# Altium PCB Advanced Clock.PcbDoc (part 5 of 7)
Units mil, origin at the board's own origin, x right, y up, seen from the top; angles counter-clockwise.
Board outline 3854 x 3880 mil, 2 copper layers (Top Layer, Bottom Layer); 117 components, 90 nets, 504 pads, 209 vias.
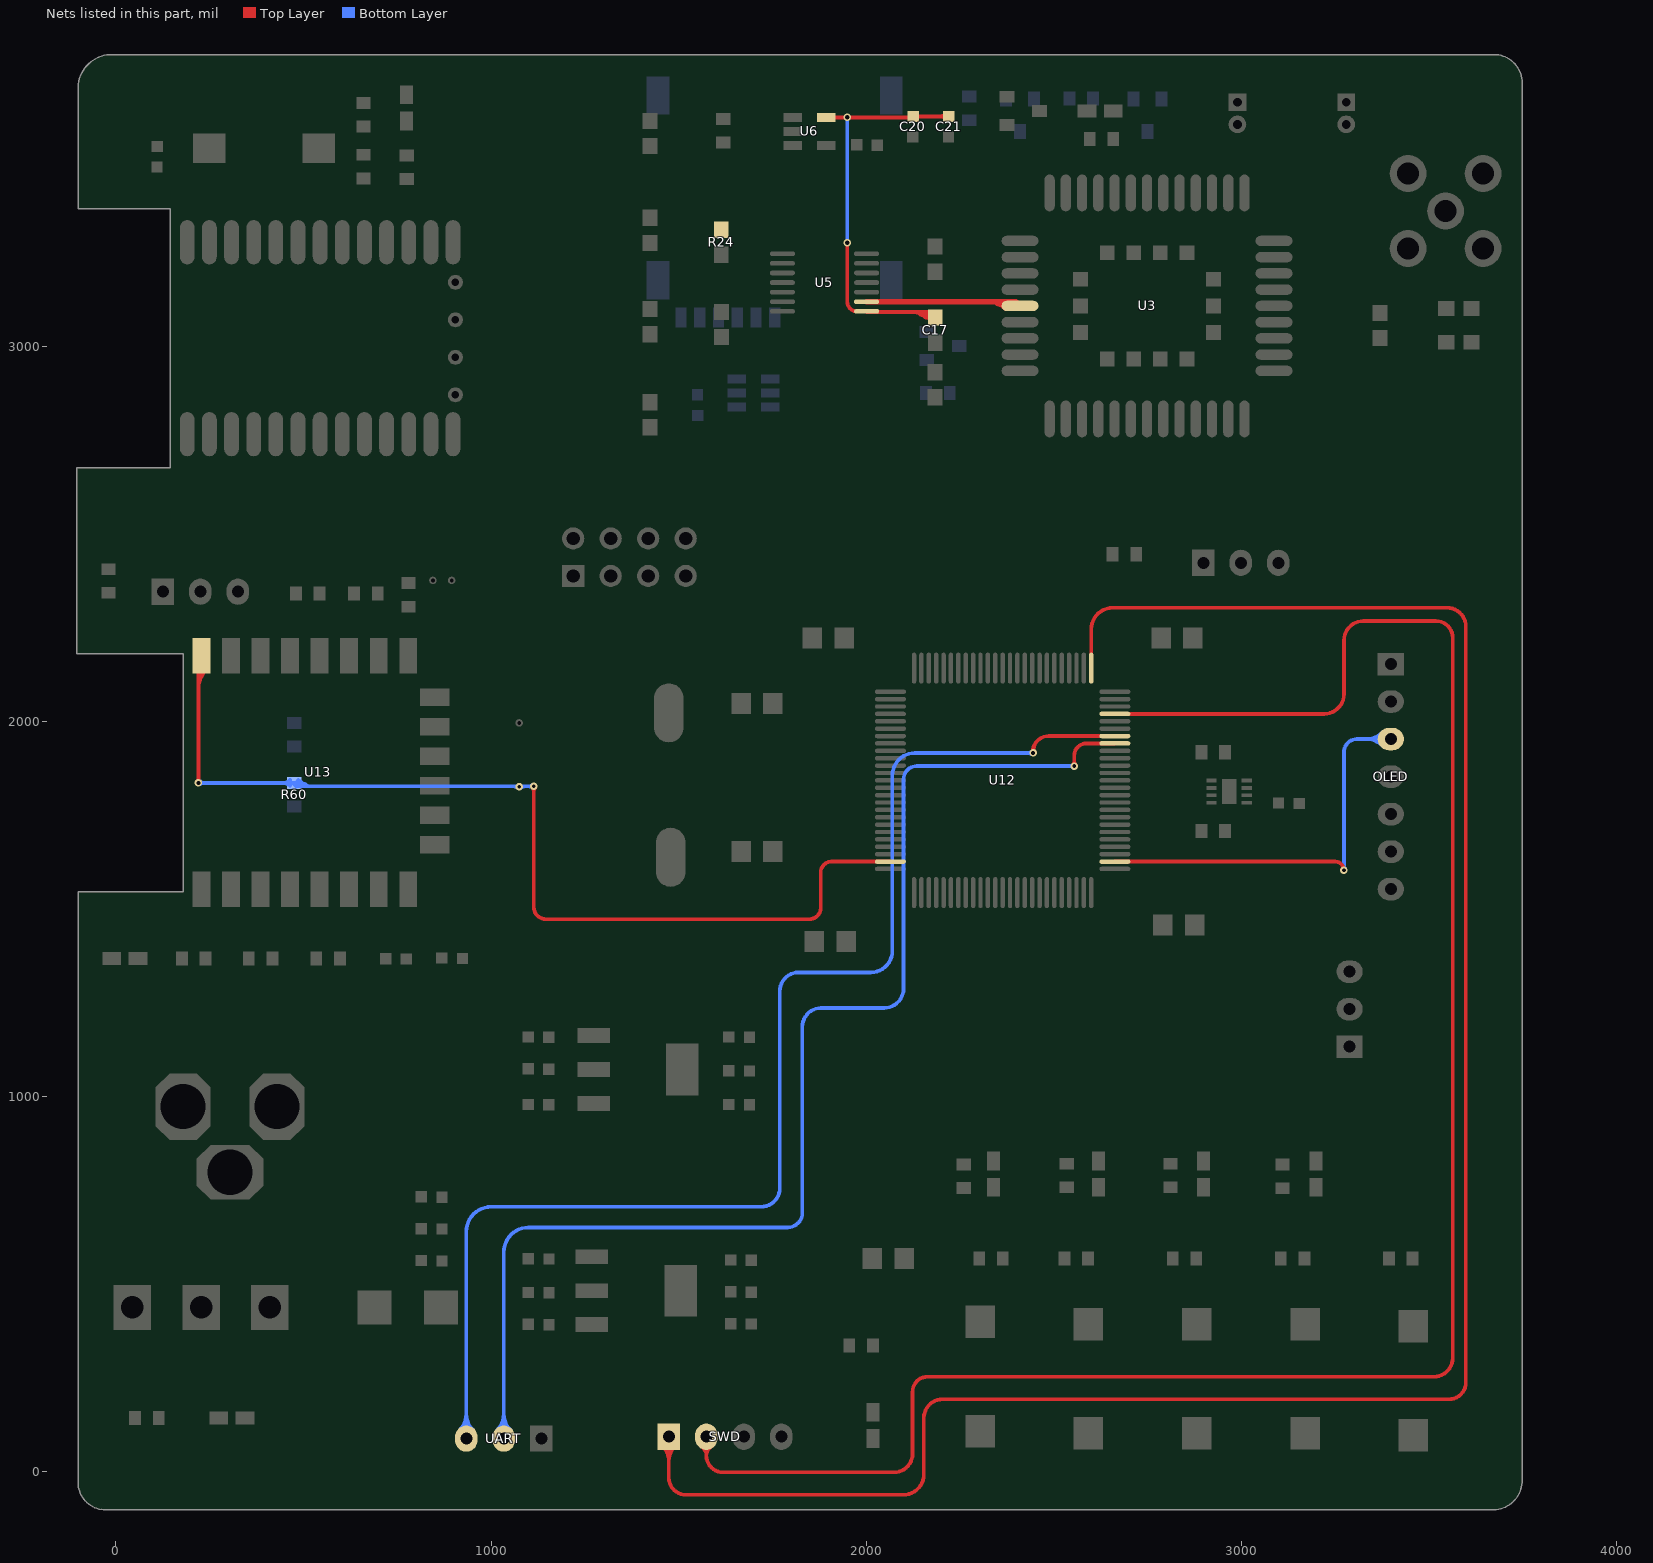
[diagram p5: the nets of this part, all layers, seen from the top]

## Via types
v1: diameter 20, hole 12, Top Layer to Bottom Layer, 133 vias
v2: diameter 20, hole 10, Top Layer to Bottom Layer, 30 vias
v3: diameter 15, hole 7, Top Layer to Bottom Layer, 26 vias
v4: diameter 30, hole 20, Top Layer to Bottom Layer, 11 vias
v5: diameter 138, hole 137.8, Top Layer to Bottom Layer, 4 vias
v6: diameter 50, hole 30, Top Layer to Bottom Layer, 4 vias
v7: diameter 40, hole 20, Top Layer to Bottom Layer, 1 vias

## Nets (pads, with @x,y where several pads share a name; then routed paths per layer and width w, separated by ;. In a path a pad name is that pad's centre, name@x,y a point inside that pad or via, vN(x,y) a via of type N, cw(c..) or ccw(c..) an arc to the next point about the centre after c; other vN are vias at no path point) (continued)
SPI2_SCK: OLED.3 U12.52 | length 2146
  Top Layer w10: U12.52@2663.21,1625.46 3250.54,1625.46 cw(c3250.54,1602) v2(3274,1602) ; v2@3269.67,1604.5 ccw(c3259.22,1610.54) 3270.88,1613.66 ; v2@3269.67,1604.5 ccw(c3259.22,1610.54) 3270.88,1613.66 ; v2@3269.67,1604.5 ccw(c3259.22,1610.54) 3270.88,1613.66 ; v2@3269.67,1604.5 ccw(c3259.22,1610.54) 3270.88,1613.66 ; v2@3269.67,1604.5 ccw(c3259.22,1610.54) 3270.88,1613.66 ; v2@3269.67,1604.5 ccw(c3259.22,1610.54) 3270.88,1613.66 ; v2@3269.67,1604.5 ccw(c3259.22,1610.54) 3270.88,1613.66 ; v2@3269.67,1604.5 ccw(c3259.22,1610.54) 3270.88,1613.66 ; 3270.88,1613.66 ccw(c3282.54,1616.78) v2@3276.5,1606.33 ; 3270.88,1613.66 ccw(c3282.54,1616.78) v2@3276.5,1606.33 ; 3270.88,1613.66 ccw(c3282.54,1616.78) v2@3276.5,1606.33 ; 3270.88,1613.66 ccw(c3282.54,1616.78) v2@3276.5,1606.33 ; 3270.88,1613.66 ccw(c3282.54,1616.78) v2@3276.5,1606.33 ; 3270.88,1613.66 ccw(c3282.54,1616.78) v2@3276.5,1606.33 ; 3270.88,1613.66 ccw(c3282.54,1616.78) v2@3276.5,1606.33 ; 3270.88,1613.66 ccw(c3282.54,1616.78) v2@3276.5,1606.33
  Bottom Layer w10: v2(3274,1602) 3274,1917 cw(c3309,1917) 3309,1952 OLED.3@3399,1952 ; v2@3270.46,1605.54 ccw(c3261.93,1614.07) 3274,1614.07 ; v2@3270.46,1605.54 ccw(c3261.93,1614.07) 3274,1614.07 ; v2@3270.46,1605.54 ccw(c3261.93,1614.07) 3274,1614.07 ; v2@3270.46,1605.54 ccw(c3261.93,1614.07) 3274,1614.07 ; v2@3270.46,1605.54 ccw(c3261.93,1614.07) 3274,1614.07 ; v2@3270.46,1605.54 ccw(c3261.93,1614.07) 3274,1614.07 ; v2@3270.46,1605.54 ccw(c3261.93,1614.07) 3274,1614.07 ; v2@3270.46,1605.54 ccw(c3261.93,1614.07) 3274,1614.07 ; 3274,1614.07 ccw(c3286.07,1614.07) v2@3277.54,1605.54 ; 3274,1614.07 ccw(c3286.07,1614.07) v2@3277.54,1605.54 ; 3274,1614.07 ccw(c3286.07,1614.07) v2@3277.54,1605.54 ; 3274,1614.07 ccw(c3286.07,1614.07) v2@3277.54,1605.54 ; 3274,1614.07 ccw(c3286.07,1614.07) v2@3277.54,1605.54 ; 3274,1614.07 ccw(c3286.07,1614.07) v2@3277.54,1605.54 ; 3274,1614.07 ccw(c3286.07,1614.07) v2@3277.54,1605.54 ; 3274,1614.07 ccw(c3286.07,1614.07) v2@3277.54,1605.54 ; 3333.64,1952 cw(c3333.64,1891.64) OLED.3@3376.32,1934.32 ; 3333.64,1952 ccw(c3333.64,2012.36) OLED.3@3376.32,1969.68 ; 3333.64,1952 cw(c3333.64,1891.64) OLED.3@3376.32,1934.32 ; 3333.64,1952 ccw(c3333.64,2012.36) OLED.3@3376.32,1969.68 ; 3333.64,1952 cw(c3333.64,1891.64) OLED.3@3376.32,1934.32 ; 3333.64,1952 ccw(c3333.64,2012.36) OLED.3@3376.32,1969.68 ; 3333.64,1952 cw(c3333.64,1891.64) OLED.3@3376.32,1934.32 ; 3333.64,1952 ccw(c3333.64,2012.36) OLED.3@3376.32,1969.68 ; 3333.64,1952 cw(c3333.64,1891.64) OLED.3@3376.32,1934.32 ; 3333.64,1952 ccw(c3333.64,2012.36) OLED.3@3376.32,1969.68 ; 3357.79,1952 cw(c3357.79,1915.79) OLED.3@3383.39,1941.39 ; 3357.79,1952 ccw(c3357.79,1988.21) OLED.3@3383.39,1962.61 ; 3357.79,1952 cw(c3357.79,1915.79) OLED.3@3383.39,1941.39 ; 3357.79,1952 ccw(c3357.79,1988.21) OLED.3@3383.39,1962.61 ; 3357.79,1952 cw(c3357.79,1915.79) OLED.3@3383.39,1941.39 ; 3357.79,1952 ccw(c3357.79,1988.21) OLED.3@3383.39,1962.61 ; 3357.79,1952 cw(c3357.79,1915.79) OLED.3@3383.39,1941.39 ; 3357.79,1952 ccw(c3357.79,1988.21) OLED.3@3383.39,1962.61 ; 3357.79,1952 cw(c3357.79,1915.79) OLED.3@3383.39,1941.39 ; 3357.79,1952 ccw(c3357.79,1988.21) OLED.3@3383.39,1962.61
SW_CLK: SWD.1 U12.76 | length 6433
  Top Layer w10: SWD.1@1474,92 1474,-17.19 ccw(c1519.81,-17.19) 1519.81,-63 2099,-63 ccw(c2099,-8) 2154,-8 2154,142 cw(c2204,142) 2204,192 3554,192 ccw(c3554,237) 3599,237 3599,2252 ccw(c3549,2252) 3549,2302 2657.38,2302 ccw(c2657.38,2244.84) 2600.22,2244.84 U12.76@2600.22,2141.21 ; SWD.1@1456.32,69.32 cw(c1413.64,26.64) 1474,26.64 ; SWD.1@1456.32,69.32 cw(c1413.64,26.64) 1474,26.64 ; SWD.1@1456.32,69.32 cw(c1413.64,26.64) 1474,26.64 ; SWD.1@1456.32,69.32 cw(c1413.64,26.64) 1474,26.64 ; SWD.1@1456.32,69.32 cw(c1413.64,26.64) 1474,26.64 ; SWD.1@1463.39,76.39 cw(c1437.79,50.79) 1474,50.79 ; SWD.1@1463.39,76.39 cw(c1437.79,50.79) 1474,50.79 ; SWD.1@1463.39,76.39 cw(c1437.79,50.79) 1474,50.79 ; SWD.1@1463.39,76.39 cw(c1437.79,50.79) 1474,50.79 ; SWD.1@1463.39,76.39 cw(c1437.79,50.79) 1474,50.79 ; 1474,26.64 cw(c1534.36,26.64) SWD.1@1491.68,69.32 ; 1474,26.64 cw(c1534.36,26.64) SWD.1@1491.68,69.32 ; 1474,26.64 cw(c1534.36,26.64) SWD.1@1491.68,69.32 ; 1474,26.64 cw(c1534.36,26.64) SWD.1@1491.68,69.32 ; 1474,26.64 cw(c1534.36,26.64) SWD.1@1491.68,69.32 ; 1474,50.79 cw(c1510.21,50.79) SWD.1@1484.61,76.39 ; 1474,50.79 cw(c1510.21,50.79) SWD.1@1484.61,76.39 ; 1474,50.79 cw(c1510.21,50.79) SWD.1@1484.61,76.39 ; 1474,50.79 cw(c1510.21,50.79) SWD.1@1484.61,76.39 ; 1474,50.79 cw(c1510.21,50.79) SWD.1@1484.61,76.39
SW_DIO: SWD.2 U12.72 | length 5643.7
  Top Layer w10: SWD.2@1574,92 1574,42 ; U12.72@2663.21,2019.17 3221.17,2019.17 ccw(c3221.17,2072) 3274,2072 3274,2214.68 cw(c3326.32,2214.68) 3326.32,2267 3519,2267 cw(c3519,2222) 3564,2222 3564,302 cw(c3514,302) 3514,252 2164,252 ccw(c2164,212) 2124,212 2124,47 cw(c2074,47) 2074,-3 1619,-3 cw(c1619,42) 1574,42 ; SWD.2@1560.79,65.77 cw(c1546,42) 1574,42 ; SWD.2@1560.79,65.77 cw(c1546,42) 1574,42 ; SWD.2@1560.79,65.77 cw(c1546,42) 1574,42 ; SWD.2@1560.79,65.77 cw(c1546,42) 1574,42 ; SWD.2@1560.79,65.77 cw(c1546,42) 1574,42 ; 1574,42 cw(c1602,42) SWD.2@1587.21,65.77 ; 1574,42 cw(c1602,42) SWD.2@1587.21,65.77 ; 1574,42 cw(c1602,42) SWD.2@1587.21,65.77 ; 1574,42 cw(c1602,42) SWD.2@1587.21,65.77 ; 1574,42 cw(c1602,42) SWD.2@1587.21,65.77
"TXD TTL": pad.1 R60.1 U12.24 U13.8 | length 4959.6
  Top Layer w10: v2(220,1835) 220,2171.94 cw(c225,2171.94) 225,2176.94 ccw(c227.82,2176.94) U13.8@227.82,2174.13 ; v2(1114,1826) 1114,1504.25 ccw(c1146.25,1504.25) 1146.25,1472 1849,1472 ccw(c1849,1502) 1879,1502 1879,1596.81 cw(c1907.66,1596.81) 1907.66,1625.46 U12.24@2064.79,1625.46 ; U13.8@214.65,2137.34 cw(c201.73,2124.42) 220,2124.42 ; U13.8@214.65,2137.34 cw(c201.73,2124.42) 220,2124.42 ; U13.8@214.65,2137.34 cw(c201.73,2124.42) 220,2124.42 ; U13.8@214.65,2137.34 cw(c201.73,2124.42) 220,2124.42 ; U13.8@214.65,2137.34 cw(c201.73,2124.42) 220,2124.42 ; v2@216.46,1838.54 ccw(c207.93,1847.07) 220,1847.07 ; v2@216.46,1838.54 ccw(c207.93,1847.07) 220,1847.07 ; v2@216.46,1838.54 ccw(c207.93,1847.07) 220,1847.07 ; v2@216.46,1838.54 ccw(c207.93,1847.07) 220,1847.07 ; v2@216.46,1838.54 ccw(c207.93,1847.07) 220,1847.07 ; v2@216.46,1838.54 ccw(c207.93,1847.07) 220,1847.07 ; v2@216.46,1838.54 ccw(c207.93,1847.07) 220,1847.07 ; v2@216.46,1838.54 ccw(c207.93,1847.07) 220,1847.07 ; 220,1847.07 ccw(c232.07,1847.07) v2@223.54,1838.54 ; 220,1847.07 ccw(c232.07,1847.07) v2@223.54,1838.54 ; 220,1847.07 ccw(c232.07,1847.07) v2@223.54,1838.54 ; 220,1847.07 ccw(c232.07,1847.07) v2@223.54,1838.54 ; 220,1847.07 ccw(c232.07,1847.07) v2@223.54,1838.54 ; 220,1847.07 ccw(c232.07,1847.07) v2@223.54,1838.54 ; 220,1847.07 ccw(c232.07,1847.07) v2@223.54,1838.54 ; 220,1847.07 ccw(c232.07,1847.07) v2@223.54,1838.54 ; 220,2086.67 cw(c291.65,2086.67) U13.8@240.99,2137.34 ; 220,2086.67 cw(c291.65,2086.67) U13.8@240.99,2137.34 ; 220,2086.67 cw(c291.65,2086.67) U13.8@240.99,2137.34 ; 220,2086.67 cw(c291.65,2086.67) U13.8@240.99,2137.34 ; 220,2086.67 cw(c291.65,2086.67) U13.8@240.99,2137.34 ; 220,2110.81 cw(c267.51,2110.81) U13.8@233.91,2144.41 ; 220,2110.81 cw(c267.51,2110.81) U13.8@233.91,2144.41 ; 220,2110.81 cw(c267.51,2110.81) U13.8@233.91,2144.41 ; 220,2110.81 cw(c267.51,2110.81) U13.8@233.91,2144.41 ; 220,2110.81 cw(c267.51,2110.81) U13.8@233.91,2144.41 ; v2@1110.46,1822.46 cw(c1101.93,1813.93) 1114,1813.93 ; v2@1110.46,1822.46 cw(c1101.93,1813.93) 1114,1813.93 ; v2@1110.46,1822.46 cw(c1101.93,1813.93) 1114,1813.93 ; v2@1110.46,1822.46 cw(c1101.93,1813.93) 1114,1813.93 ; v2@1110.46,1822.46 cw(c1101.93,1813.93) 1114,1813.93 ; v2@1110.46,1822.46 cw(c1101.93,1813.93) 1114,1813.93 ; v2@1110.46,1822.46 cw(c1101.93,1813.93) 1114,1813.93 ; v2@1110.46,1822.46 cw(c1101.93,1813.93) 1114,1813.93 ; 1114,1813.93 cw(c1126.07,1813.93) v2@1117.54,1822.46 ; 1114,1813.93 cw(c1126.07,1813.93) v2@1117.54,1822.46 ; 1114,1813.93 cw(c1126.07,1813.93) v2@1117.54,1822.46 ; 1114,1813.93 cw(c1126.07,1813.93) v2@1117.54,1822.46 ; 1114,1813.93 cw(c1126.07,1813.93) v2@1117.54,1822.46 ; 1114,1813.93 cw(c1126.07,1813.93) v2@1117.54,1822.46 ; 1114,1813.93 cw(c1126.07,1813.93) v2@1117.54,1822.46 ; 1114,1813.93 cw(c1126.07,1813.93) v2@1117.54,1822.46
  Bottom Layer w10: v2@225,1840 ccw(c230,1840) 230,1835 R60.1@475,1835 ccw(c484,1835) 484,1826 v2(1114,1826) ; v2@223.54,1831.46 cw(c232.07,1822.93) 232.07,1835 ; v2@223.54,1831.46 cw(c232.07,1822.93) 232.07,1835 ; v2@223.54,1831.46 cw(c232.07,1822.93) 232.07,1835 ; v2@223.54,1831.46 cw(c232.07,1822.93) 232.07,1835 ; v2@223.54,1831.46 cw(c232.07,1822.93) 232.07,1835 ; v2@223.54,1831.46 cw(c232.07,1822.93) 232.07,1835 ; v2@223.54,1831.46 cw(c232.07,1822.93) 232.07,1835 ; v2@223.54,1831.46 cw(c232.07,1822.93) 232.07,1835 ; v2@223.54,1838.54 ccw(c232.07,1847.07) 232.07,1835 ; v2@223.54,1838.54 ccw(c232.07,1847.07) 232.07,1835 ; v2@223.54,1838.54 ccw(c232.07,1847.07) 232.07,1835 ; v2@223.54,1838.54 ccw(c232.07,1847.07) 232.07,1835 ; v2@223.54,1838.54 ccw(c232.07,1847.07) 232.07,1835 ; v2@223.54,1838.54 ccw(c232.07,1847.07) 232.07,1835 ; v2@223.54,1838.54 ccw(c232.07,1847.07) 232.07,1835 ; v2@223.54,1838.54 ccw(c232.07,1847.07) 232.07,1835 ; 445.8,1835 cw(c445.8,1809.05) R60.1@464.15,1827.4 ; 445.8,1835 ccw(c445.8,1860.95) R60.1@464.15,1842.6 ; 445.8,1835 cw(c445.8,1809.05) R60.1@464.15,1827.4 ; 445.8,1835 ccw(c445.8,1860.95) R60.1@464.15,1842.6 ; 445.8,1835 cw(c445.8,1809.05) R60.1@464.15,1827.4 ; 445.8,1835 ccw(c445.8,1860.95) R60.1@464.15,1842.6 ; 445.8,1835 cw(c445.8,1809.05) R60.1@464.15,1827.4 ; 445.8,1835 ccw(c445.8,1860.95) R60.1@464.15,1842.6 ; 445.8,1835 cw(c445.8,1809.05) R60.1@464.15,1827.4 ; 445.8,1835 ccw(c445.8,1860.95) R60.1@464.15,1842.6 ; 445.8,1835 cw(c445.8,1809.05) R60.1@464.15,1827.4 ; 445.8,1835 ccw(c445.8,1860.95) R60.1@464.15,1842.6 ; 445.8,1835 cw(c445.8,1809.05) R60.1@464.15,1827.4 ; 445.8,1835 ccw(c445.8,1860.95) R60.1@464.15,1842.6 ; 445.8,1835 cw(c445.8,1809.05) R60.1@464.15,1827.4 ; 445.8,1835 ccw(c445.8,1860.95) R60.1@464.15,1842.6 ; R60.1@478.8,1834.5 cw(c488.69,1825.57) 495.36,1837.11 ; R60.1@478.8,1834.5 cw(c488.69,1825.57) 495.36,1837.11 ; R60.1@478.8,1834.5 cw(c488.69,1825.57) 495.36,1837.11 ; R60.1@478.8,1834.5 cw(c488.69,1825.57) 495.36,1837.11 ; R60.1@478.8,1834.5 cw(c488.69,1825.57) 495.36,1837.11 ; R60.1@478.8,1834.5 cw(c488.69,1825.57) 495.36,1837.11 ; R60.1@478.8,1834.5 cw(c488.69,1825.57) 495.36,1837.11 ; R60.1@478.8,1834.5 cw(c488.69,1825.57) 495.36,1837.11 ; R60.1@478.8,1834.5 cw(c488.69,1825.57) 495.36,1837.11 ; R60.1@478.8,1834.5 cw(c488.69,1825.57) 495.36,1837.11 ; R60.1@478.78,1835.53 ccw(c501.78,1858.53) 501.78,1826 ; R60.1@478.78,1835.53 ccw(c501.78,1858.53) 501.78,1826 ; R60.1@478.78,1835.53 ccw(c501.78,1858.53) 501.78,1826 ; R60.1@478.78,1835.53 ccw(c501.78,1858.53) 501.78,1826 ; R60.1@478.78,1835.53 ccw(c501.78,1858.53) 501.78,1826 ; R60.1@485.85,1842.6 ccw(c525.92,1882.68) 525.92,1826 ; R60.1@485.85,1842.6 ccw(c525.92,1882.68) 525.92,1826 ; R60.1@485.85,1842.6 ccw(c525.92,1882.68) 525.92,1826 ; R60.1@485.85,1842.6 ccw(c525.92,1882.68) 525.92,1826 ; R60.1@485.85,1842.6 ccw(c525.92,1882.68) 525.92,1826 ; R60.1@486.23,1827.8 cw(c498.08,1817.1) 506.06,1830.93 ; R60.1@486.23,1827.8 cw(c498.08,1817.1) 506.06,1830.93 ; R60.1@486.23,1827.8 cw(c498.08,1817.1) 506.06,1830.93 ; R60.1@486.23,1827.8 cw(c498.08,1817.1) 506.06,1830.93 ; R60.1@486.23,1827.8 cw(c498.08,1817.1) 506.06,1830.93 ; R60.1@486.23,1827.8 cw(c498.08,1817.1) 506.06,1830.93 ; R60.1@486.23,1827.8 cw(c498.08,1817.1) 506.06,1830.93 ; R60.1@486.23,1827.8 cw(c498.08,1817.1) 506.06,1830.93 ; R60.1@486.23,1827.8 cw(c498.08,1817.1) 506.06,1830.93 ; R60.1@486.23,1827.8 cw(c498.08,1817.1) 506.06,1830.93 ; 1060.51,1826 cw(c1060.51,1810.51) pad.1@1071.46,1821.46 ; 1060.51,1826 cw(c1060.51,1810.51) pad.1@1071.46,1821.46 ; 1060.51,1826 cw(c1060.51,1810.51) pad.1@1071.46,1821.46 ; pad.1@1078.54,1821.46 cw(c1089.49,1810.51) 1089.49,1826 ; pad.1@1078.54,1821.46 cw(c1089.49,1810.51) 1089.49,1826 ; pad.1@1078.54,1821.46 cw(c1089.49,1810.51) 1089.49,1826 ; 1101.93,1826 cw(c1101.93,1813.93) v2@1110.46,1822.46 ; 1101.93,1826 ccw(c1101.93,1838.07) v2@1110.46,1829.54 ; 1101.93,1826 cw(c1101.93,1813.93) v2@1110.46,1822.46 ; 1101.93,1826 ccw(c1101.93,1838.07) v2@1110.46,1829.54 ; 1101.93,1826 cw(c1101.93,1813.93) v2@1110.46,1822.46 ; 1101.93,1826 ccw(c1101.93,1838.07) v2@1110.46,1829.54 ; 1101.93,1826 cw(c1101.93,1813.93) v2@1110.46,1822.46 ; 1101.93,1826 ccw(c1101.93,1838.07) v2@1110.46,1829.54 ; 1101.93,1826 cw(c1101.93,1813.93) v2@1110.46,1822.46 ; 1101.93,1826 ccw(c1101.93,1838.07) v2@1110.46,1829.54 ; 1101.93,1826 cw(c1101.93,1813.93) v2@1110.46,1822.46 ; 1101.93,1826 ccw(c1101.93,1838.07) v2@1110.46,1829.54 ; 1101.93,1826 cw(c1101.93,1813.93) v2@1110.46,1822.46 ; 1101.93,1826 ccw(c1101.93,1838.07) v2@1110.46,1829.54 ; 1101.93,1826 cw(c1101.93,1813.93) v2@1110.46,1822.46 ; 1101.93,1826 ccw(c1101.93,1838.07) v2@1110.46,1829.54
TXD_BC26: U3.18 U5.2 | length 858.8
  Top Layer w10: U3.18@2399.39,3118.02 cw(c2399.39,3107) U3.18@2410.42,3107
  Top Layer w15: U5.2@2001.2,3118.02 U3.18@2399.39,3118.02 ; 2333.21,3118.02 cw(c2333.21,3065.23) U3.18@2370.54,3102.56 ; 2333.21,3118.02 cw(c2333.21,3065.23) U3.18@2370.54,3102.56 ; 2333.21,3118.02 cw(c2333.21,3065.23) U3.18@2370.54,3102.56 ; 2333.21,3118.02 cw(c2333.21,3065.23) U3.18@2370.54,3102.56 ; 2333.21,3118.02 cw(c2333.21,3065.23) U3.18@2370.54,3102.56 ; 2349.91,3114.47 ccw(c2362.97,3137.1) U3.18@2372.66,3112.83 ; 2349.91,3114.47 ccw(c2362.97,3137.1) U3.18@2372.66,3112.83 ; 2349.91,3114.47 ccw(c2362.97,3137.1) U3.18@2372.66,3112.83 ; 2349.91,3114.47 ccw(c2362.97,3137.1) U3.18@2372.66,3112.83 ; 2349.91,3114.47 ccw(c2362.97,3137.1) U3.18@2372.66,3112.83 ; 2349.91,3114.47 ccw(c2362.97,3137.1) U3.18@2372.66,3112.83 ; 2349.91,3114.47 ccw(c2362.97,3137.1) U3.18@2372.66,3112.83 ; 2349.91,3114.47 ccw(c2362.97,3137.1) U3.18@2372.66,3112.83 ; 2349.91,3114.47 ccw(c2362.97,3137.1) U3.18@2372.66,3112.83 ; 2349.91,3114.47 ccw(c2362.97,3137.1) U3.18@2372.66,3112.83
UART1_RX: U12.69 UART.3 | length 4478.9
  Top Layer w10: v2@2444,1917 cw(c2487.11,1917) 2487.11,1960.11 U12.69@2663.21,1960.11 ; 2447.62,1930.5 ccw(c2464.17,1926.07) v2@2449.33,1917.5 ; 2447.62,1930.5 ccw(c2464.17,1926.07) v2@2449.33,1917.5 ; 2447.62,1930.5 ccw(c2464.17,1926.07) v2@2449.33,1917.5 ; 2447.62,1930.5 ccw(c2464.17,1926.07) v2@2449.33,1917.5 ; 2447.62,1930.5 ccw(c2464.17,1926.07) v2@2449.33,1917.5 ; 2447.62,1930.5 ccw(c2464.17,1926.07) v2@2449.33,1917.5 ; 2447.62,1930.5 ccw(c2464.17,1926.07) v2@2449.33,1917.5 ; 2447.62,1930.5 ccw(c2464.17,1926.07) v2@2449.33,1917.5
  Bottom Layer w10: UART.3@934,87 934,638.75 cw(c1000.25,638.75) 1000.25,705 1720,705 ccw(c1720,755) 1770,755 1770,1280 cw(c1820,1280) 1820,1330 2012.64,1330 ccw(c2012.64,1387.36) 2070,1387.36 2070,1855 cw(c2130,1855) 2130,1915 v2(2445,1915) ; UART.3@916.32,109.68 ccw(c873.64,152.36) 934,152.36 ; UART.3@916.32,109.68 ccw(c873.64,152.36) 934,152.36 ; UART.3@916.32,109.68 ccw(c873.64,152.36) 934,152.36 ; UART.3@916.32,109.68 ccw(c873.64,152.36) 934,152.36 ; UART.3@916.32,109.68 ccw(c873.64,152.36) 934,152.36 ; UART.3@923.39,102.61 ccw(c897.79,128.21) 934,128.21 ; UART.3@923.39,102.61 ccw(c897.79,128.21) 934,128.21 ; UART.3@923.39,102.61 ccw(c897.79,128.21) 934,128.21 ; UART.3@923.39,102.61 ccw(c897.79,128.21) 934,128.21 ; UART.3@923.39,102.61 ccw(c897.79,128.21) 934,128.21 ; 934,128.21 ccw(c970.21,128.21) UART.3@944.61,102.61 ; 934,128.21 ccw(c970.21,128.21) UART.3@944.61,102.61 ; 934,128.21 ccw(c970.21,128.21) UART.3@944.61,102.61 ; 934,128.21 ccw(c970.21,128.21) UART.3@944.61,102.61 ; 934,128.21 ccw(c970.21,128.21) UART.3@944.61,102.61 ; 934,152.36 ccw(c994.36,152.36) UART.3@951.68,109.68 ; 934,152.36 ccw(c994.36,152.36) UART.3@951.68,109.68 ; 934,152.36 ccw(c994.36,152.36) UART.3@951.68,109.68 ; 934,152.36 ccw(c994.36,152.36) UART.3@951.68,109.68 ; 934,152.36 ccw(c994.36,152.36) UART.3@951.68,109.68 ; 2432.93,1915 cw(c2432.93,1902.93) v2@2441.46,1911.46 ; 2432.93,1915 ccw(c2432.93,1927.07) v2@2441.46,1918.54 ; 2432.93,1915 cw(c2432.93,1902.93) v2@2441.46,1911.46 ; 2432.93,1915 ccw(c2432.93,1927.07) v2@2441.46,1918.54 ; 2432.93,1915 cw(c2432.93,1902.93) v2@2441.46,1911.46 ; 2432.93,1915 ccw(c2432.93,1927.07) v2@2441.46,1918.54 ; 2432.93,1915 cw(c2432.93,1902.93) v2@2441.46,1911.46 ; 2432.93,1915 ccw(c2432.93,1927.07) v2@2441.46,1918.54 ; 2432.93,1915 cw(c2432.93,1902.93) v2@2441.46,1911.46 ; 2432.93,1915 ccw(c2432.93,1927.07) v2@2441.46,1918.54 ; 2432.93,1915 cw(c2432.93,1902.93) v2@2441.46,1911.46 ; 2432.93,1915 ccw(c2432.93,1927.07) v2@2441.46,1918.54 ; 2432.93,1915 cw(c2432.93,1902.93) v2@2441.46,1911.46 ; 2432.93,1915 ccw(c2432.93,1927.07) v2@2441.46,1918.54 ; 2432.93,1915 cw(c2432.93,1902.93) v2@2441.46,1911.46 ; 2432.93,1915 ccw(c2432.93,1927.07) v2@2441.46,1918.54
UART1_TX: U12.68 UART.2 | length 4426.5
  Top Layer w10: v2(2555,1880) 2555,1908 cw(c2587.43,1908) 2587.43,1940.43 U12.68@2663.21,1940.43 ; v2@2551.46,1883.54 ccw(c2542.93,1892.07) 2555,1892.07 ; v2@2551.46,1883.54 ccw(c2542.93,1892.07) 2555,1892.07 ; v2@2551.46,1883.54 ccw(c2542.93,1892.07) 2555,1892.07 ; v2@2551.46,1883.54 ccw(c2542.93,1892.07) 2555,1892.07 ; v2@2551.46,1883.54 ccw(c2542.93,1892.07) 2555,1892.07 ; v2@2551.46,1883.54 ccw(c2542.93,1892.07) 2555,1892.07 ; v2@2551.46,1883.54 ccw(c2542.93,1892.07) 2555,1892.07 ; v2@2551.46,1883.54 ccw(c2542.93,1892.07) 2555,1892.07 ; 2555,1892.07 ccw(c2567.07,1892.07) v2@2558.54,1883.54 ; 2555,1892.07 ccw(c2567.07,1892.07) v2@2558.54,1883.54 ; 2555,1892.07 ccw(c2567.07,1892.07) v2@2558.54,1883.54 ; 2555,1892.07 ccw(c2567.07,1892.07) v2@2558.54,1883.54 ; 2555,1892.07 ccw(c2567.07,1892.07) v2@2558.54,1883.54 ; 2555,1892.07 ccw(c2567.07,1892.07) v2@2558.54,1883.54 ; 2555,1892.07 ccw(c2567.07,1892.07) v2@2558.54,1883.54 ; 2555,1892.07 ccw(c2567.07,1892.07) v2@2558.54,1883.54
  Bottom Layer w10: UART.2@1034,87 1034,584.1 cw(c1099.9,584.1) 1099.9,650 1790.86,650 ccw(c1790.86,689.14) 1830,689.14 1830,1185 cw(c1880,1185) 1880,1235 2047.68,1235 ccw(c2047.68,1287.32) 2100,1287.32 2100,1845 cw(c2135,1845) 2135,1880 v2(2555,1880) ; UART.2@1016.32,109.68 ccw(c973.64,152.36) 1034,152.36 ; UART.2@1016.32,109.68 ccw(c973.64,152.36) 1034,152.36 ; UART.2@1016.32,109.68 ccw(c973.64,152.36) 1034,152.36 ; UART.2@1016.32,109.68 ccw(c973.64,152.36) 1034,152.36 ; UART.2@1016.32,109.68 ccw(c973.64,152.36) 1034,152.36 ; UART.2@1023.39,102.61 ccw(c997.79,128.21) 1034,128.21 ; UART.2@1023.39,102.61 ccw(c997.79,128.21) 1034,128.21 ; UART.2@1023.39,102.61 ccw(c997.79,128.21) 1034,128.21 ; UART.2@1023.39,102.61 ccw(c997.79,128.21) 1034,128.21 ; UART.2@1023.39,102.61 ccw(c997.79,128.21) 1034,128.21 ; 1034,128.21 ccw(c1070.21,128.21) UART.2@1044.61,102.61 ; 1034,128.21 ccw(c1070.21,128.21) UART.2@1044.61,102.61 ; 1034,128.21 ccw(c1070.21,128.21) UART.2@1044.61,102.61 ; 1034,128.21 ccw(c1070.21,128.21) UART.2@1044.61,102.61 ; 1034,128.21 ccw(c1070.21,128.21) UART.2@1044.61,102.61 ; 1034,152.36 ccw(c1094.36,152.36) UART.2@1051.68,109.68 ; 1034,152.36 ccw(c1094.36,152.36) UART.2@1051.68,109.68 ; 1034,152.36 ccw(c1094.36,152.36) UART.2@1051.68,109.68 ; 1034,152.36 ccw(c1094.36,152.36) UART.2@1051.68,109.68 ; 1034,152.36 ccw(c1094.36,152.36) UART.2@1051.68,109.68 ; 2542.93,1880 cw(c2542.93,1867.93) v2@2551.46,1876.46 ; 2542.93,1880 ccw(c2542.93,1892.07) v2@2551.46,1883.54 ; 2542.93,1880 cw(c2542.93,1867.93) v2@2551.46,1876.46 ; 2542.93,1880 ccw(c2542.93,1892.07) v2@2551.46,1883.54 ; 2542.93,1880 cw(c2542.93,1867.93) v2@2551.46,1876.46 ; 2542.93,1880 ccw(c2542.93,1892.07) v2@2551.46,1883.54 ; 2542.93,1880 cw(c2542.93,1867.93) v2@2551.46,1876.46 ; 2542.93,1880 ccw(c2542.93,1892.07) v2@2551.46,1883.54 ; 2542.93,1880 cw(c2542.93,1867.93) v2@2551.46,1876.46 ; 2542.93,1880 ccw(c2542.93,1892.07) v2@2551.46,1883.54 ; 2542.93,1880 cw(c2542.93,1867.93) v2@2551.46,1876.46 ; 2542.93,1880 ccw(c2542.93,1892.07) v2@2551.46,1883.54 ; 2542.93,1880 cw(c2542.93,1867.93) v2@2551.46,1876.46 ; 2542.93,1880 ccw(c2542.93,1892.07) v2@2551.46,1883.54 ; 2542.93,1880 cw(c2542.93,1867.93) v2@2551.46,1876.46 ; 2542.93,1880 ccw(c2542.93,1892.07) v2@2551.46,1883.54
VCC1.8: R24.2
VCC1V8: C17.1 C20.2 C21.2 U5.1 U6.5 | length 3013.4
  Top Layer w10: U6.5@1893.29,3609.4 C20.2@2117.54,3609.4 ; v1(1950,3275) 1950,3117.9 ccw(c1975.47,3117.9) 1975.47,3092.43 U5.1@2001.2,3092.43 ccw(c2002.89,3092.43) 2002.89,3090.75 C17.1@2184.17,3090.75 ; C20.2@2125.35,3617.21 cw(c2117.54,3617.21) C20.2@2117.54,3609.4 ; C21.2@2220.35,3612.21 C20.2@2125.35,3612.21 cw(c2122.54,3612.21) 2122.54,3609.4 C20.2@2117.54,3609.4 ; U5.1@2029.29,3093.35 ccw(c2035.57,3099.63) 2035.57,3090.75 ; U5.1@2029.29,3093.35 ccw(c2035.57,3099.63) 2035.57,3090.75 ; U5.1@2029.29,3093.35 ccw(c2035.57,3099.63) 2035.57,3090.75 ; U5.1@2029.29,3093.35 ccw(c2035.57,3099.63) 2035.57,3090.75 ; U5.1@2029.29,3093.35 ccw(c2035.57,3099.63) 2035.57,3090.75 ; U5.1@2029.29,3093.35 ccw(c2035.57,3099.63) 2035.57,3090.75 ; U5.1@2029.29,3093.35 ccw(c2035.57,3099.63) 2035.57,3090.75 ; U5.1@2029.29,3093.35 ccw(c2035.57,3099.63) 2035.57,3090.75 ; 2117.26,3090.75 cw(c2117.26,3010.8) C17.1@2173.79,3067.33 ; 2117.26,3090.75 cw(c2117.26,3010.8) C17.1@2173.79,3067.33 ; 2117.26,3090.75 cw(c2117.26,3010.8) C17.1@2173.79,3067.33 ; 2117.26,3090.75 cw(c2117.26,3010.8) C17.1@2173.79,3067.33 ; 2117.26,3090.75 cw(c2117.26,3010.8) C17.1@2173.79,3067.33 ; 2141.4,3090.75 cw(c2141.4,3034.95) C17.1@2180.86,3074.41 ; 2141.4,3090.75 cw(c2141.4,3034.95) C17.1@2180.86,3074.41 ; 2141.4,3090.75 cw(c2141.4,3034.95) C17.1@2180.86,3074.41 ; 2141.4,3090.75 cw(c2141.4,3034.95) C17.1@2180.86,3074.41 ; 2141.4,3090.75 cw(c2141.4,3034.95) C17.1@2180.86,3074.41 ; 2145.05,3083.93 ccw(c2156.77,3104.24) C17.1@2173.62,3087.93 ; 2145.05,3083.93 ccw(c2156.77,3104.24) C17.1@2173.62,3087.93 ; 2145.05,3083.93 ccw(c2156.77,3104.24) C17.1@2173.62,3087.93 ; 2145.05,3083.93 ccw(c2156.77,3104.24) C17.1@2173.62,3087.93 ; 2145.05,3083.93 ccw(c2156.77,3104.24) C17.1@2173.62,3087.93 ; 2145.05,3083.93 ccw(c2156.77,3104.24) C17.1@2173.62,3087.93 ; 2145.05,3083.93 ccw(c2156.77,3104.24) C17.1@2173.62,3087.93 ; 2145.05,3083.93 ccw(c2156.77,3104.24) C17.1@2173.62,3087.93 ; 2145.05,3083.93 ccw(c2156.77,3104.24) C17.1@2173.62,3087.93 ; 2145.05,3083.93 ccw(c2156.77,3104.24) C17.1@2173.62,3087.93 ; 2156.14,3077.52 ccw(c2166.26,3095.05) C17.1@2180.81,3080.98 ; 2156.14,3077.52 ccw(c2166.26,3095.05) C17.1@2180.81,3080.98 ; 2156.14,3077.52 ccw(c2166.26,3095.05) C17.1@2180.81,3080.98 ; 2156.14,3077.52 ccw(c2166.26,3095.05) C17.1@2180.81,3080.98 ; 2156.14,3077.52 ccw(c2166.26,3095.05) C17.1@2180.81,3080.98 ; 2156.14,3077.52 ccw(c2166.26,3095.05) C17.1@2180.81,3080.98 ; 2156.14,3077.52 ccw(c2166.26,3095.05) C17.1@2180.81,3080.98 ; 2156.14,3077.52 ccw(c2166.26,3095.05) C17.1@2180.81,3080.98 ; 2156.14,3077.52 ccw(c2166.26,3095.05) C17.1@2180.81,3080.98 ; 2156.14,3077.52 ccw(c2166.26,3095.05) C17.1@2180.81,3080.98 ; 2158.11,3087.54 ccw(c2165.4,3100.17) C17.1@2174.75,3088.98 ; 2158.11,3087.54 ccw(c2165.4,3100.17) C17.1@2174.75,3088.98 ; 2158.11,3087.54 ccw(c2165.4,3100.17) C17.1@2174.75,3088.98 ; 2158.11,3087.54 ccw(c2165.4,3100.17) C17.1@2174.75,3088.98 ; 2158.11,3087.54 ccw(c2165.4,3100.17) C17.1@2174.75,3088.98 ; 2158.11,3087.54 ccw(c2165.4,3100.17) C17.1@2174.75,3088.98 ; 2158.11,3087.54 ccw(c2165.4,3100.17) C17.1@2174.75,3088.98 ; 2158.11,3087.54 ccw(c2165.4,3100.17) C17.1@2174.75,3088.98 ; 2158.11,3087.54 ccw(c2165.4,3100.17) C17.1@2174.75,3088.98 ; 2158.11,3087.54 ccw(c2165.4,3100.17) C17.1@2174.75,3088.98 ; 2160.67,3086.06 cw(c2150.67,3068.74) C17.1@2169.99,3073.92 ; 2160.67,3086.06 cw(c2150.67,3068.74) C17.1@2169.99,3073.92 ; 2160.67,3086.06 cw(c2150.67,3068.74) C17.1@2169.99,3073.92 ; 2160.67,3086.06 cw(c2150.67,3068.74) C17.1@2169.99,3073.92 ; 2160.67,3086.06 cw(c2150.67,3068.74) C17.1@2169.99,3073.92 ; 2160.67,3086.06 cw(c2150.67,3068.74) C17.1@2169.99,3073.92 ; 2160.67,3086.06 cw(c2150.67,3068.74) C17.1@2169.99,3073.92 ; 2160.67,3086.06 cw(c2150.67,3068.74) C17.1@2169.99,3073.92 ; 2160.67,3086.06 cw(c2150.67,3068.74) C17.1@2169.99,3073.92 ; 2160.67,3086.06 cw(c2150.67,3068.74) C17.1@2169.99,3073.92 ; C17.1@2165.55,3090.75 cw(c2165.55,3059.09) C17.1@2187.93,3081.48 ; C17.1@2165.55,3090.75 cw(c2165.55,3059.09) C17.1@2187.93,3081.48 ; C17.1@2165.55,3090.75 cw(c2165.55,3059.09) C17.1@2187.93,3081.48 ; C17.1@2165.55,3090.75 cw(c2165.55,3059.09) C17.1@2187.93,3081.48 ; C17.1@2165.55,3090.75 cw(c2165.55,3059.09) C17.1@2187.93,3081.48 ; 2196.21,3612.21 cw(c2196.21,3588.07) C21.2@2213.28,3605.14 ; 2196.21,3612.21 ccw(c2196.21,3636.35) C21.2@2213.28,3619.28 ; 2196.21,3612.21 cw(c2196.21,3588.07) C21.2@2213.28,3605.14 ; 2196.21,3612.21 ccw(c2196.21,3636.35) C21.2@2213.28,3619.28 ; 2196.21,3612.21 cw(c2196.21,3588.07) C21.2@2213.28,3605.14 ; 2196.21,3612.21 ccw(c2196.21,3636.35) C21.2@2213.28,3619.28 ; 2196.21,3612.21 cw(c2196.21,3588.07) C21.2@2213.28,3605.14 ; 2196.21,3612.21 ccw(c2196.21,3636.35) C21.2@2213.28,3619.28 ; 2196.21,3612.21 cw(c2196.21,3588.07) C21.2@2213.28,3605.14 ; 2196.21,3612.21 ccw(c2196.21,3636.35) C21.2@2213.28,3619.28 ; 2196.21,3612.21 cw(c2196.21,3588.07) C21.2@2213.28,3605.14 ; 2196.21,3612.21 ccw(c2196.21,3636.35) C21.2@2213.28,3619.28 ; 2196.21,3612.21 cw(c2196.21,3588.07) C21.2@2213.28,3605.14 ; 2196.21,3612.21 ccw(c2196.21,3636.35) C21.2@2213.28,3619.28 ; 2196.21,3612.21 cw(c2196.21,3588.07) C21.2@2213.28,3605.14 ; 2196.21,3612.21 ccw(c2196.21,3636.35) C21.2@2213.28,3619.28
  Bottom Layer w10: v1(1950,3275) v1(1950,3610)